# EAGLE board CT_schematic (EAGLE 7.6.0)

Size 100 x 80 mm. Coordinates in mm from the lower left corner, seen from the top.
Outline: 0,0 100,0 100,80 0,80 0,0
Copper layers (1*16): Top 0.035mm / dielectric 1.5mm / Bottom 0.035mm
Design rules "default": minimum track width 10mil, minimum drill 24mil, track to track 8mil, track to pad 8mil, pad to pad 8mil, via to via 8mil, smd to smd 8mil, copper to edge 40mil, drill to drill 8mil, minimum pad ring 10mil, minimum via ring 8mil, stop-mask expansion 4mil, vias tented up to drill 0mil, thermal gap 10mil

## Footprints (pad centres in the part's own frame; a part is rotated, then mirrored left to right if it is on the bottom)
C0603 = smd 0.8 x 0.8: 1 -0.762,0; 2 0.762,0
C0402 = smd 0.5 x 0.5: 1 -0.508,0; 2 0.508,0
C1210 = smd 1.2 x 2.5: 1 -1.524,0; 2 1.524,0
EXV-9H = smd 3.505 x 1.676: 1 -2.857,0; 2 2.857,0
L0603 = smd 0.8 x 0.8: 1 -0.762,0; 2 0.762,0
PJ-037B_PACKAGE = drill 3.7 square: 1 12,0 | drill 3.2 square: 2 6,0
R0603 = smd 0.8 x 0.8: 1 -0.762,0; 2 0.762,0
LQFP64 = smd 0.3 x 1.2: 1 -3.75,-5.75; 2 -3.25,-5.75; 3 -2.75,-5.75; 4 -2.25,-5.75; 5 -1.75,-5.75; 6 -1.25,-5.75; 7 -0.75,-5.75; 8 -0.25,-5.75; 9 0.25,-5.75; 10 0.75,-5.75; 11 1.25,-5.75; 12 1.75,-5.75; 13 2.25,-5.75; 14 2.75,-5.75; 15 3.25,-5.75; 16 3.75,-5.75; 33 3.75,5.75; 34 3.25,5.75; 35 2.75,5.75; 36 2.25,5.75; 37 1.75,5.75; 38 1.25,5.75; 39 0.75,5.75; 40 0.25,5.75; 41 -0.25,5.75; 42 -0.75,5.75; 43 -1.25,5.75; 44 -1.75,5.75; 45 -2.25,5.75; 46 -2.75,5.75; 47 -3.25,5.75; 48 -3.75,5.75 | smd 1.2 x 0.3: 17 5.75,-3.75; 18 5.75,-3.25; 19 5.75,-2.75; 20 5.75,-2.25; 21 5.75,-1.75; 22 5.75,-1.25; 23 5.75,-0.75; 24 5.75,-0.25; 25 5.75,0.25; 26 5.75,0.75; 27 5.75,1.25; 28 5.75,1.75; 29 5.75,2.25; 30 5.75,2.75; 31 5.75,3.25; 32 5.75,3.75; 49 -5.75,3.75; 50 -5.75,3.25; 51 -5.75,2.75; 52 -5.75,2.25; 53 -5.75,1.75; 54 -5.75,1.25; 55 -5.75,0.75; 56 -5.75,0.25; 57 -5.75,-0.25; 58 -5.75,-0.75; 59 -5.75,-1.25; 60 -5.75,-1.75; 61 -5.75,-2.25; 62 -5.75,-2.75; 63 -5.75,-3.25; 64 -5.75,-3.75
A2200-A = smd 1.5 x 0.8: 1 -4.85,6.35; 2 -4.85,5.08; 3 -4.85,3.81; 4 -4.85,2.54; 5 -4.85,1.27; 6 -4.85,0; 7 -4.85,-1.27; 8 -4.85,-2.54; 9 -4.85,-3.81; 10 -4.85,-5.08; 11 -4.85,-6.35; 12 4.85,-6.35; 13 4.85,-5.08; 14 4.85,-3.81; 15 4.85,-2.54; 16 4.85,-1.27; 17 4.85,0; 18 4.85,1.27; 19 4.85,2.54; 20 4.85,3.81; 21 4.85,5.08; 22 4.85,6.35 | smd 1.2 x 1.2: 23 -2,2; 24 -2,0; 25 -2,-2; 26 0,-2; 27 0,0; 28 0,2; 29 2,2; 30 2,0; 31 2,-2
COAXIAL_C = smd 1 x 1: 1 0,-1.5; 2 0,1.5 | smd 1.05 x 2.2: 3 -1.475,0; 4 1.475,0
SOIC-8 = smd 1.6 x 0.6: 1 -2.7,1.905 | smd 1.55 x 0.6: 2 -2.7,0.635; 3 -2.7,-0.635; 4 -2.7,-1.905; 5 2.7,-1.905; 6 2.7,-0.635; 7 2.7,0.635; 8 2.7,1.905
TDFN-8/6MM = smd 0.3 x 0.75: 1 0,0; 2 0.5,0; 3 1,0; 4 1.5,0; 5 1.5,3; 6 1,3; 7 0.5,3; 8 0,3
ABS07-32.768KHZ-7-T = smd 1.1 x 2.4: 1 -2.5,0; 2 0,0
ASFL1 = smd 1.7 x 1.5: 1 -1.27,-1.1; 2 1.27,-1.1; 3 1.27,1.1; 4 -1.27,1.1
WSON-8 = smd 0.3 x 0.6: 1 -0.75,0; 2 0.05,0; 3 0.85,0; 4 1.65,0; 5 1.65,3.8; 6 0.85,3.8; 7 0.05,3.8; 8 -0.75,3.8 | smd 3 x 2.6: PAD 0.45,1.9
SON-6 = smd 0.55 x 0.3: 1 -0.355,0.5 | smd 0.52 x 0.3: 2 -0.37,0; 3 -0.37,-0.5; 4 0.37,-0.5; 5 0.37,0; 6 0.37,0.5
SW_4-1437565-2 = smd 1.4 x 2.1: 1 -2.23,4.55; 2 -2.23,-4.55; 3 2.23,4.55; 4 2.23,-4.55
LGM67K-G1J2-24-Z = smd 0.8 x 1.4: A -2,0; C 0,0
NC7SZ125M5X = smd 1.3 x 0.7: 1 -1.3,0.95; 2 -1.3,0; 3 -1.3,-0.95; 4 1.3,-0.95; 5 1.3,0.95
DUMMY_PACKAGE_134 = drill 0.3: 1 0,-1; 2 1.5,-1; 3 3,-1

## Placement (x,y rotation side)
C1  1e-06  [C0603]  -53.34,57.15 0 top  (outside the outline)
C2  1e-07  [C0603]  -57.15,57.15 0 top  (outside the outline)
C3  1e-07  [C0603]  -60.96,57.15 0 top  (outside the outline)
C4  1e-07  [C0603]  -64.77,57.15 0 top  (outside the outline)
C5  1e-07  [C0603]  -15.24,62.23 0 top  (outside the outline)
C6  1e-07  [C0603]  -19.05,62.23 0 top  (outside the outline)
C7  4.7e-06  [C0603]  -49.53,57.15 0 top  (outside the outline)
C8  1e-08  [C0603]  -22.86,62.23 0 top  (outside the outline)
C9  1e-08  [C0603]  -26.67,62.23 0 top  (outside the outline)
C10  1e-06  [C0603]  -30.48,62.23 0 top  (outside the outline)
C11  1e-11  [C0402]  -22.86,67.31 0 top  (outside the outline)
C12  1e-11  [C0402]  -26.67,67.31 0 top  (outside the outline)
C13  1e-07  [C0402]  -30.48,67.31 0 top  (outside the outline)
C14  1e-08  [C0402]  -34.29,67.31 0 top  (outside the outline)
C15  1e-08  [C0402]  -38.1,67.31 0 top  (outside the outline)
C16  1e-08  [C0402]  -41.91,67.31 0 top  (outside the outline)
C17  1e-08  [C0402]  -45.72,67.31 0 top  (outside the outline)
C18  1e-05  [C1210]  -16.51,52.07 0 top  (outside the outline)
C19  1e-05  [C1210]  -22.86,52.07 0 top  (outside the outline)
C20  1e-07  [C0402]  -49.53,67.31 0 top  (outside the outline)
C21  0.0001  [EXV-9H]  -17.78,44.45 0 top  (outside the outline)
C22  0.0001  [EXV-9H]  -29.21,44.45 0 top  (outside the outline)
C23  1e-08  [C0402]  -53.34,67.31 0 top  (outside the outline)
C24  1e-08  [C0402]  -57.15,67.31 0 top  (outside the outline)
F1  240.0  [L0603]  -34.29,62.23 0 top  (outside the outline)
J1  PJ-037B  [PJ-037B_PACKAGE]  -40.64,7.62 0 top  (outside the outline)
R2  1000.0  [R0603]  -38.1,62.23 0 top  (outside the outline)
R4  4700.0  [R0603]  -41.91,62.23 0 top  (outside the outline)
R5  4700.0  [R0603]  -45.72,62.23 0 top  (outside the outline)
R6  2200.0  [R0603]  -49.53,62.23 0 top  (outside the outline)
R7  2200.0  [R0603]  -53.34,62.23 0 top  (outside the outline)
R8  2200.0  [R0603]  -57.15,62.23 0 top  (outside the outline)
R9  2200.0  [R0603]  -60.96,62.23 0 top  (outside the outline)
R10  10000.0  [R0603]  -55.88,50.8 0 top  (outside the outline)
R11  10000.0  [R0603]  -60.96,50.8 0 top  (outside the outline)
R12  10000.0  [R0603]  -66.04,50.8 0 top  (outside the outline)
R13  10000.0  [R0603]  -15.24,57.15 0 top  (outside the outline)
R14  10000.0  [R0603]  -20.32,57.15 0 top  (outside the outline)
R15  10000.0  [R0603]  -25.4,57.15 0 top  (outside the outline)
R16  10000.0  [R0603]  -30.48,57.15 0 top  (outside the outline)
R17  10000.0  [R0603]  -35.56,57.15 0 top  (outside the outline)
R18  100000.0  [R0603]  -40.64,50.8 0 top  (outside the outline)
R19  2231.0  [R0603]  -64.77,62.23 0 top  (outside the outline)
R20  1000.0  [R0603]  -15.24,67.31 0 top  (outside the outline)
R21  10000.0  [R0603]  -40.64,57.15 0 top  (outside the outline)
R22  10000.0  [R0603]  -45.72,57.15 0 top  (outside the outline)
R23  9100.0  [R0603]  -19.05,67.31 0 top  (outside the outline)
R24  680000.0  [R0603]  -45.72,50.8 0 top  (outside the outline)
R25  120000.0  [R0603]  -50.8,50.8 0 top  (outside the outline)
U1  STM32F101RDT6  [LQFP64]  -53.34,7.62 0 top  (outside the outline)
U2  A2200-A  [A2200-A]  -19.05,10.16 0 top  (outside the outline)
U3  73412-0114  [COAXIAL_C]  -58.42,35.56 0 top  (outside the outline)
U4  AT25128B-SSHL-T  [SOIC-8]  -59.69,24.13 0 top  (outside the outline)
U5  24AA32AT-I/MNY  [TDFN-8/6MM]  -44.45,22.86 0 top  (outside the outline)
U6  ABS07-32.768KHZ-7-T  [ABS07-32.768KHZ-7-T]  -50.8,44.45 0 top  (outside the outline)
U7  ASFL1-25MHZ-NCS  [ASFL1]  -46.99,35.56 0 top  (outside the outline)
U8  LP3878SDX-ADJ/NOPB  [WSON-8]  -30.48,34.29 0 top  (outside the outline)
U9  TPS3895ADRYR  [SON-6]  -13.97,71.12 0 top  (outside the outline)
U10  4-1437565-2  [SW_4-1437565-2]  -27.94,25.4 0 top  (outside the outline)
U11  Q65110A2395  [LGM67K-G1J2-24-Z]  -59.69,44.45 0 top  (outside the outline)
U12  nc7sz125m5x  [NC7SZ125M5X]  -27.94,50.8 0 top  (outside the outline)
U13  nc7sz125m5x  [NC7SZ125M5X]  -34.29,50.8 0 top  (outside the outline)
U14  Dummy  [DUMMY_PACKAGE_134]  -63.5,67.31 0 top  (outside the outline)

## Library data of the parts
C1-C24 F1 J1 R2 R4-R25 U1-U14 = circuit_tree

## Nets
CLK_CRYSTAL_U1_3: C11.1 U1.3 U6.1
CLK_CRYSTAL_U1_4: C12.1 U1.4 U6.2
CLK_U1_5: U1.5 U7.3
GND: C1.2 C2.2 C3.2 C4.2 C5.2 C6.2 C7.2 C8.2 C9.2 C10.2 C11.2 C12.2 C13.2 C14.2 C15.2 C16.2 C17.2 C18.2 C19.2 C20.2 C21.2 C22.2 C23.2 C24.2 J1.2 R2.2 R10.2 R17.2 R20.2 R23.2 R25.2 U1.12 U1.18 U1.31 U1.47 U1.63 U2.7 U2.8 U2.23 U2.24 U2.25 U2.26 U2.27 U2.28 U2.29 U2.30 U2.31 U4.4 U5.4 U5.7 U7.2 U8.3 U8.PAD U9.2 U11.C U12.1 U12.3 U13.1 U13.3 U14.1
NET_U1_7: R5.1 U1.7 U13.4
NET_U1_13: C8.1 C9.1 C10.1 F1.1 U1.13
NET_U1_29: R8.1 U1.29 U5.6
NET_U1_30: R9.1 U1.30 U5.5
NET_U1_58: R6.1 U1.58 U2.15
NET_U1_59: R7.1 U1.59 U2.16
NET_U1_60: R10.1 U1.60
NET_U1_61: U11.A
NET_U1_62: U10.3 U10.4
NET_U2_2: R11.2 U2.2
NET_U2_6: U2.6
NET_U2_17: R11.1 U2.17
NET_U2_19: U2.19
NET_U2_22: R4.1 U2.22 U12.4
NET_U3_1: U2.11 U3.1
NET_U3_2: U2.10 U3.2 U3.3 U3.4
NET_U4_3: R12.1 U4.3
NET_U4_7: R14.1 U4.7
NET_U5_1: R15.1 U5.1
NET_U5_2: R16.1 U5.2
NET_U5_3: R17.1 U5.3
NET_U8_1: C17.1 U8.1
NET_U8_6: R19.2 R20.1 U8.6
NET_U8_8: R18.1 U8.8
NET_U9_1: R22.1 R23.1 U9.1
NET_U9_3: R24.2 R25.1 U9.3
NET_U9_4: R21.1 U9.4 U12.2 U13.2
NET_U10_1: R2.1 U10.1 U10.2
PROC_SPI1_MISO: U1.22 U4.2
PROC_SPI1_MOSI: U1.23 U4.5
PROC_SPI1_NSS: R13.1 U1.20 U4.1
PROC_SPI1_SCK: U1.21 U4.6
PROC_TIM2_CH3: U1.16 U14.3
PROC_TIM2_CH4: U1.17 U14.2
VCC_S1_13V9: C18.1 C21.1 C22.1 J1.1 R18.2 U8.4
VCC_TIER1_3V3: C1.1 C2.1 C3.1 C4.1 C5.1 C6.1 C7.1 C13.1 C14.1 C15.1 C16.1 C19.1 C20.1 C23.1 C24.1 F1.2 R4.2 R5.2 R6.2 R7.2 R8.2 R9.2 R12.2 R13.2 R14.2 R15.2 R16.2 R19.1 R21.2 R22.2 R24.1 U1.1 U1.19 U1.32 U1.48 U1.64 U2.20 U4.8 U5.8 U7.4 U8.5 U9.6 U12.5 U13.5

## Tracks (layer width: path | path; a pad name or v marks a point on that pad's centre or on a via)
CLK_CRYSTAL_U1_3  (2 unrouted)
CLK_CRYSTAL_U1_4  (2 unrouted)
CLK_U1_5  (1 unrouted)
GND  (59 unrouted)
NET_U1_7  (2 unrouted)
NET_U1_13  (4 unrouted)
NET_U1_29  (2 unrouted)
NET_U1_30  (2 unrouted)
NET_U1_58  (2 unrouted)
NET_U1_59  (2 unrouted)
NET_U1_60  (1 unrouted)
NET_U1_62  (1 unrouted)
NET_U2_2  (1 unrouted)
NET_U2_17  (1 unrouted)
NET_U2_22  (2 unrouted)
NET_U3_1  (1 unrouted)
NET_U3_2  (3 unrouted)
NET_U4_3  (1 unrouted)
NET_U4_7  (1 unrouted)
NET_U5_1  (1 unrouted)
NET_U5_2  (1 unrouted)
NET_U5_3  (1 unrouted)
NET_U8_1  (1 unrouted)
NET_U8_6  (2 unrouted)
NET_U8_8  (1 unrouted)
NET_U9_1  (2 unrouted)
NET_U9_3  (2 unrouted)
NET_U9_4  (3 unrouted)
NET_U10_1  (2 unrouted)
PROC_SPI1_MISO  (1 unrouted)
PROC_SPI1_MOSI  (1 unrouted)
PROC_SPI1_NSS  (2 unrouted)
PROC_SPI1_SCK  (1 unrouted)
PROC_TIM2_CH3  (1 unrouted)
PROC_TIM2_CH4  (1 unrouted)
VCC_S1_13V9  (5 unrouted)
VCC_TIER1_3V3  (43 unrouted)